# Altium PCB PCB_MonitorHolter.PcbDoc
Units mm, origin at the board's own origin, x right, y up, seen from the top; angles counter-clockwise.
Board outline 137.92 x 86.74 mm, 2 copper layers (Top Layer, Bottom Layer); 62 components, 106 nets, 248 pads, 91 vias.
Unrouted connection lines stored in the file: 198.
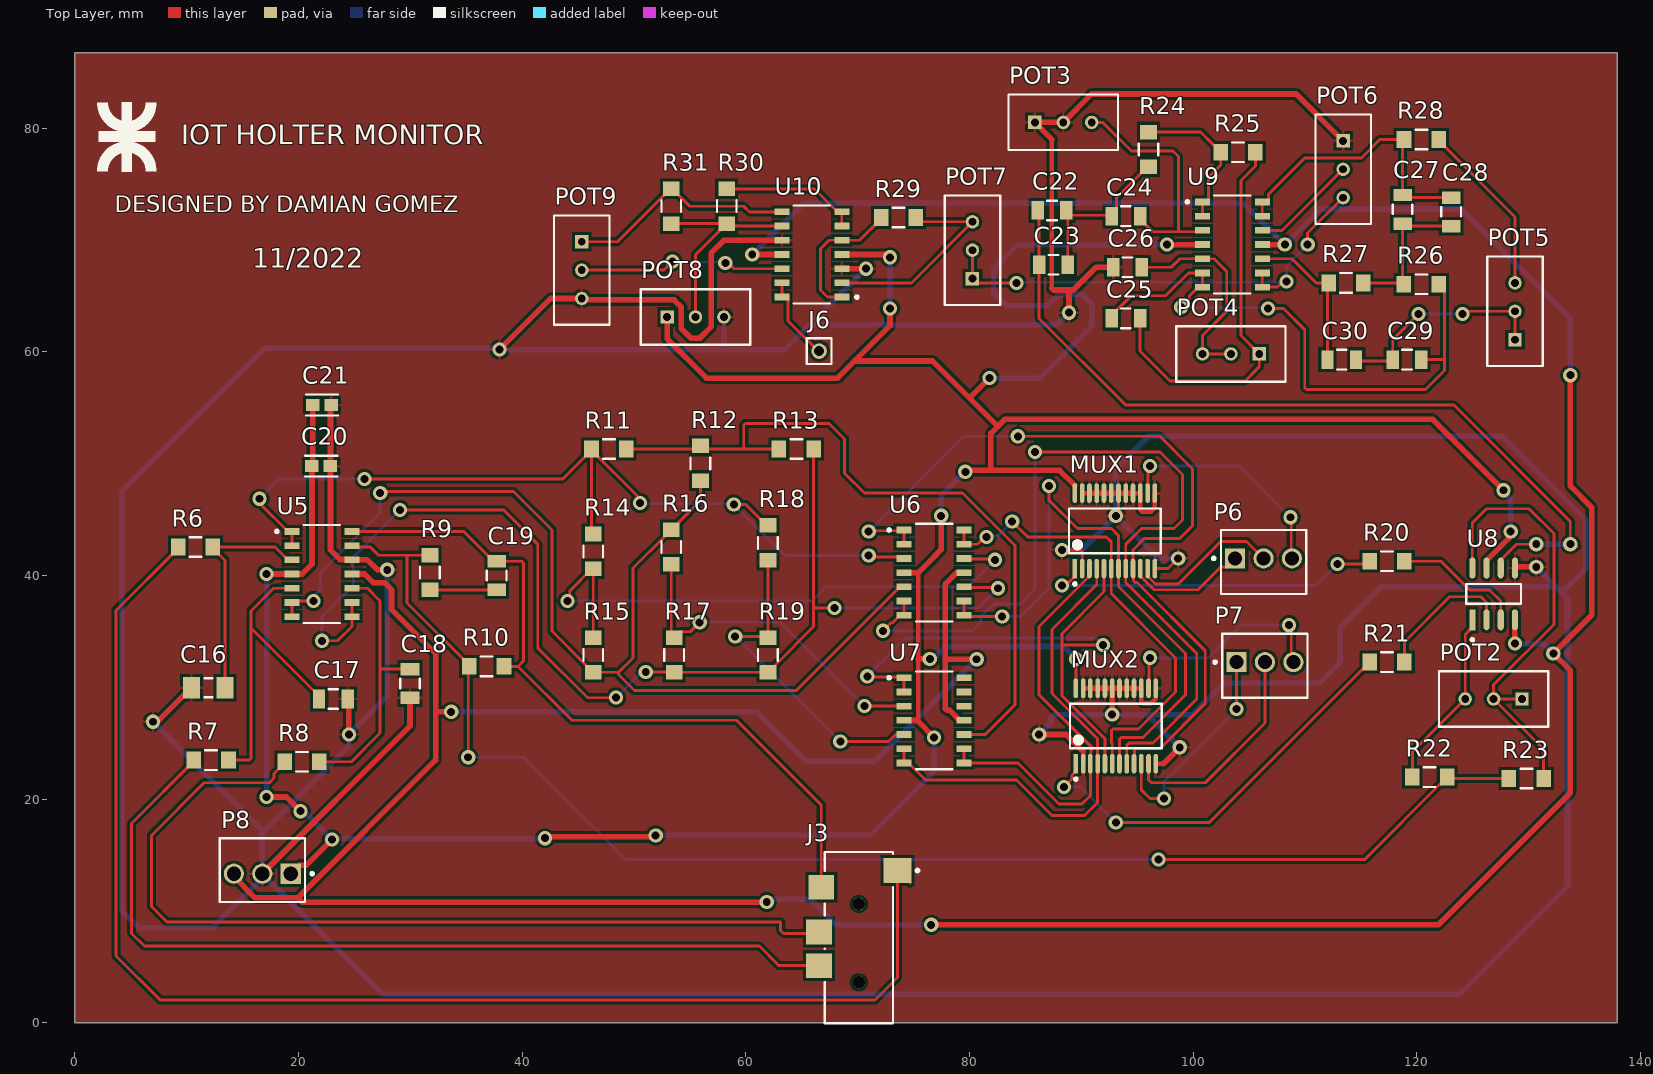
[diagram p0: Top Layer view]
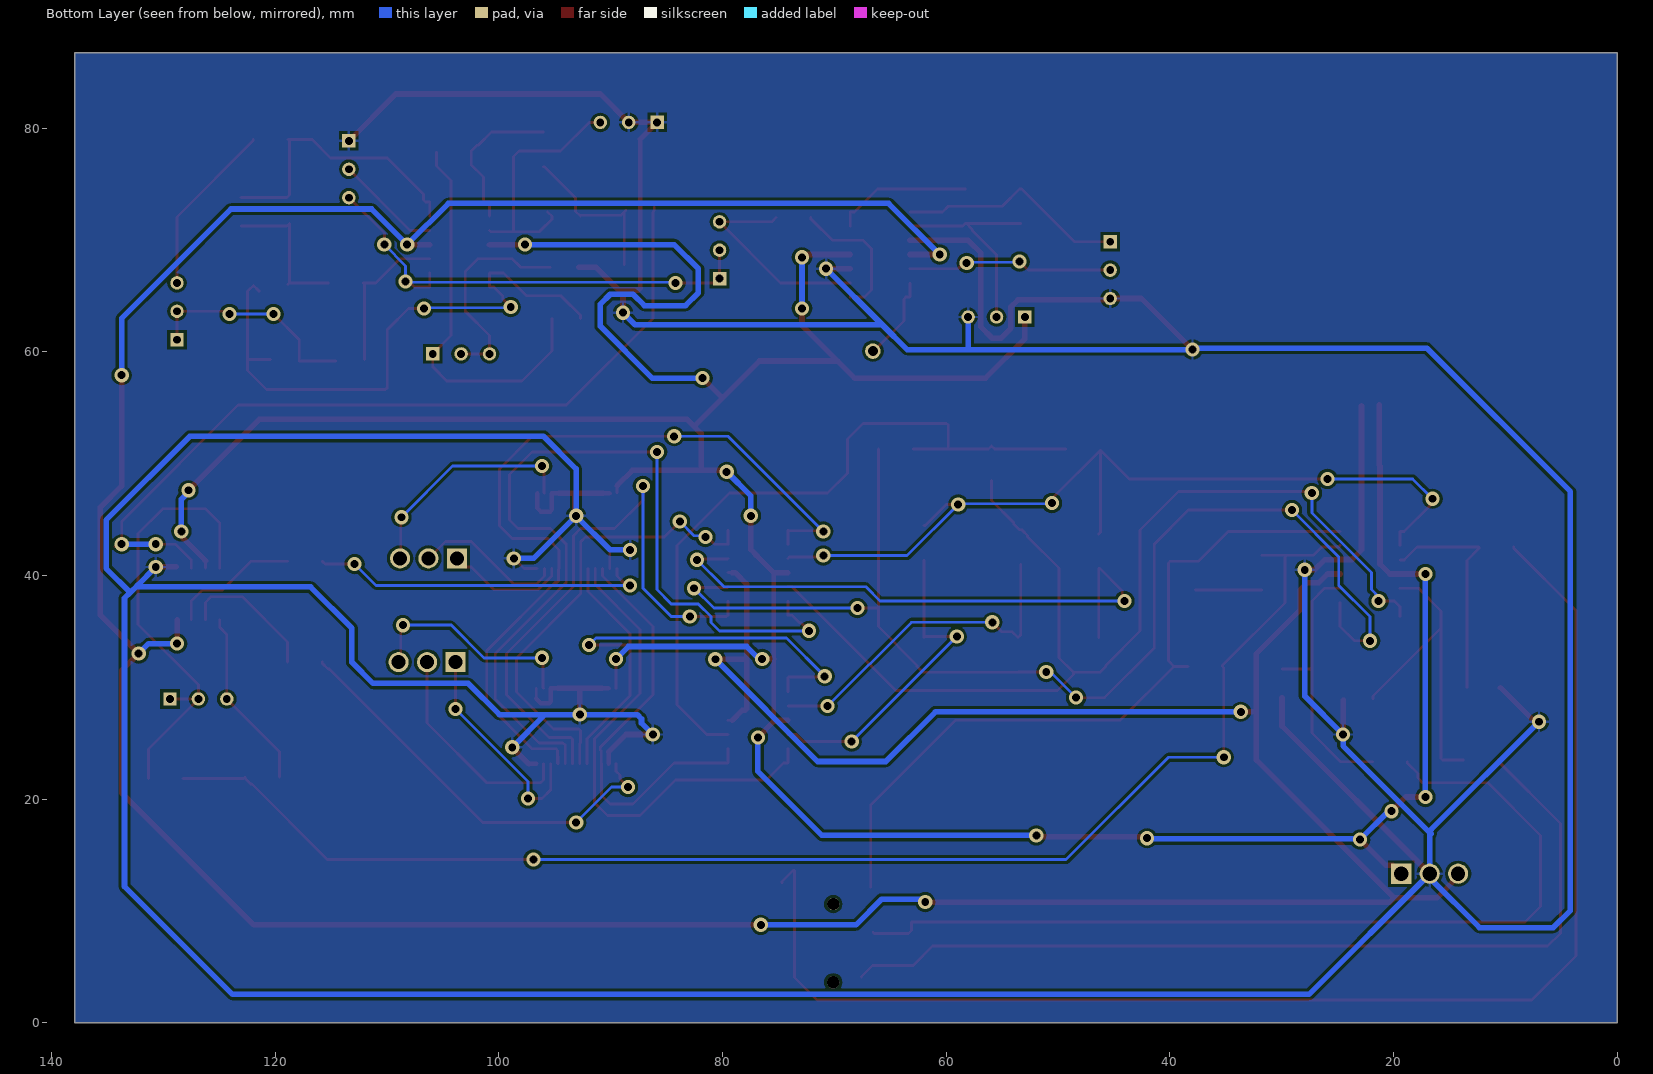
[diagram p1: Bottom Layer view, seen from below]
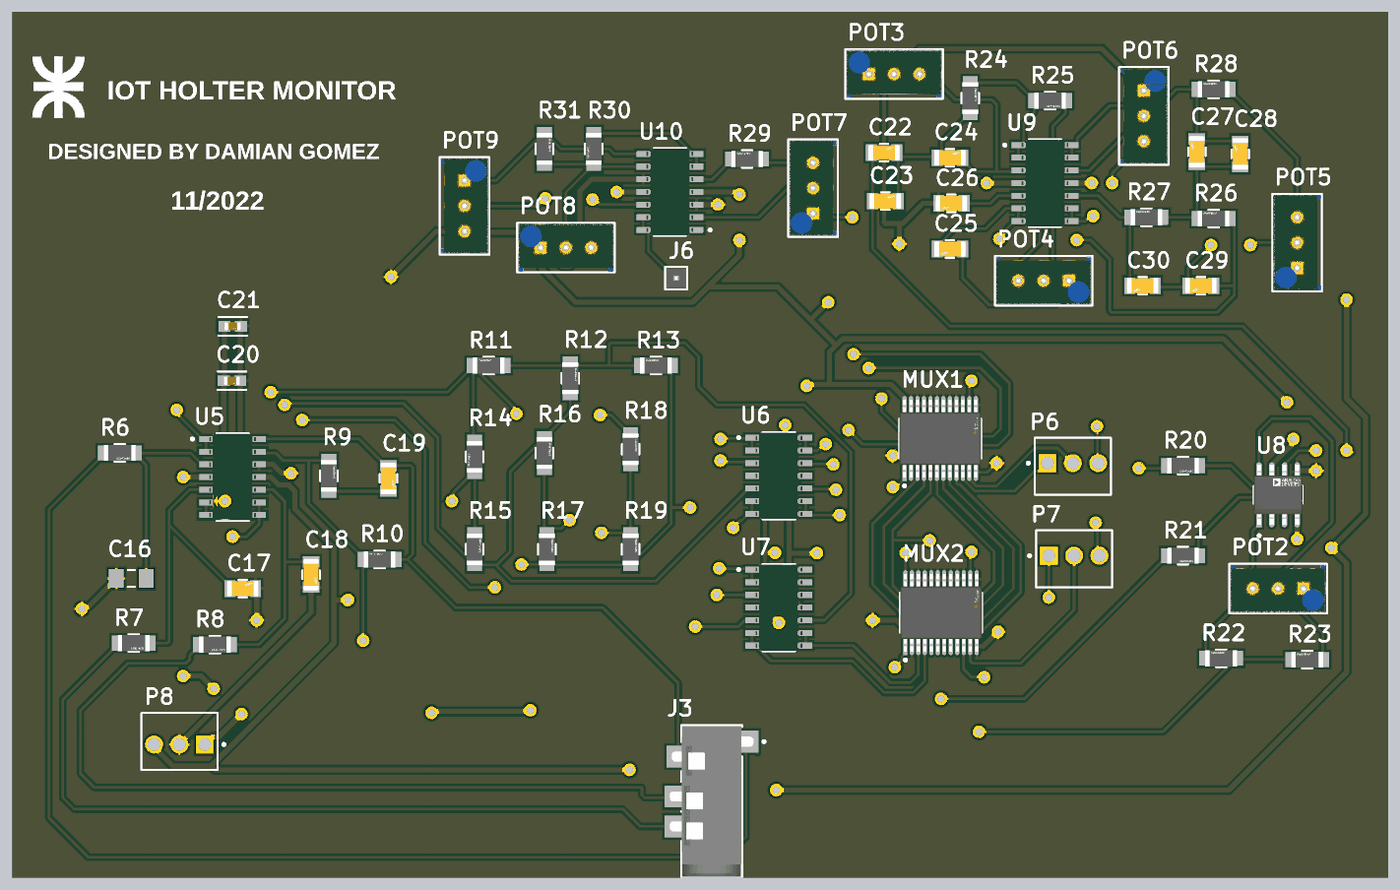
[diagram p2: 3D render of the assembled board from above, using the file's embedded part models]

## Layer stack, top to bottom
Top Solder: solder mask 0.0102, Solder Resist, Dk 3.5
Top Layer: signal copper 0.0356
Dielectric 1: dielectric 0.32, FR-4, Dk 4.8
Bottom Layer: signal copper 0.0356
Bottom Solder: solder mask 0.0102, Solder Resist, Dk 3.5

## Board outline
0,0 137.922,0 137.922,86.741 0,86.741

## Design rules (kind name [scope] priority, off if disabled: settings)
Clearance GND_Power [InNamedPolygon('POWER-GND')] p1: gap=0.254 ignorepadtopadclearanceinfootprint=FALSE
Clearance [All vs InNet('No Net')] p2: gap=0.254 ignorepadtopadclearanceinfootprint=FALSE
PolygonConnect [All] p1: connectstyle=Relief reliefconductorwidth=0.254 reliefentries=4 polygonreliefangle="90 Angle" airgapwidth=0.254
RoutingVias [All] p1: holewidth=0.711 width=1.27 viastyle="Through Hole" minholewidth=0.711 minwidth=1.27 maxholewidth=0.711 maxwidth=1.27
SolderMaskExpansion [All] p1: expansion=0.102
Width [All] p1: maxlimit=0.5 minlimit=0.254 preferedwidth=0.254 minimp=50.000000 maximp=50.000000 favimp=50.000000
30 further rules are at their usual default settings.

## Classes and differential pairs
component class "Filtrado y amplificación": C22 C23 C24 C25 C26 C27 C28 C29 C30 POT3 POT4 POT5 POT6 POT7 R24 R25 R26 R27 R28 R29 U9 U10
component class "Adquisición de señal y preamplificacion": C16 C17 C18 C19 C20 C21 J3 MUX1 MUX2 P6 P7 P8 POT2 R6 R7 R8 R9 R10 R11 R12 R13 R14 R15 R16 R17 R18 R19 R20 R21 R22 R23 U6 U7
component class "Acondicionamiento de la señal": POT8 POT9 R30 R31

## Components (designator, comment, footprint, x,y, rotation, side; value= is the part's Value field where it differs from the comment)
C16 "1.5n" KEMT-1206-2_M 11.938,29.972 r0 top
C17 "1.5nF" FP-CL31-IPC_C 23.114,28.956 r0 top
C18 "1.5nF" FP-CL31-IPC_C 29.972,30.353 r270 top
C19 "10nF" FP-CL31-IPC_C 37.719,40.005 r270 top
C20 "" FP-0603-L_1_6_0_15-W_0_81-IPC_A 22.034,49.784 r0 top
C21 "" FP-0603-L_1_6_0_15-W_0_81-IPC_A 22.098,55.245 r0 top
C22 "10uF" FP-CL31-IPC_C 87.384,72.644 r0 top
C23 "10uF" FP-CL31-IPC_C 87.511,67.788 r0 top
C24 "10uF" FP-CL31-IPC_C 93.988,72.136 r0 top
C25 "1u" FP-CL31-IPC_C 93.988,62.992 r180 top
C26 "1u" FP-CL31-IPC_C 94.128,67.564 r180 top
C27 "100n" FP-CL31-IPC_C 118.727,72.745 r90 top
C28 "100n" FP-CL31-IPC_C 123.071,72.517 r90 top
C29 "100n" FP-CL31-IPC_C 119.134,59.309 r180 top
C30 "100n" FP-CL31-IPC_C 113.292,59.309 r180 top
J3 "SJ2-3574A-SMT-TR" FP-SJ2-3574A-SMT-TR-MFG 70.104,7.62 r90 top
J6 "TMM-101-01-T-S" FP-TMM-101-01-T-S-MFG 66.554,60.071 r0 top
MUX1 "CD74HC4067SM96" FP-DB0024A-IPC_C 93.005,43.996 r90 top
MUX2 "CD74HC4067SM96" FP-DB0024A-IPC_C 93.091,26.543 r90 top
P6 "640456-3" TECO-640456-3 106.299,41.529 r180 top
P7 "640456-3" TECO-640456-3 106.426,32.258 r180 top
P8 "640456-3" TECO-640456-3 16.764,13.335 r0 top
POT2 "10k" FP-3296W-MFG 126.873,28.956 r90 top
POT3 "100k" FP-3296W-MFG 88.392,80.523 r270 top
POT4 "5k" FP-3296W-MFG 103.378,59.812 r90 top
POT5 "POT5" FP-3296W-MFG 128.781,63.627 r0 top
POT6 "50k" FP-3296W-MFG 113.419,76.327 r180 top
POT7 "10k" FP-3296W-MFG 80.264,69.088 r0 top
POT8 "10k" FP-3296W-MFG 55.499,63.124 r270 top
POT9 "10k" FP-3296W-MFG 45.339,67.31 r180 top
R6 "100k" FP-RC3216-MFG 10.795,42.545 r0 top
R7 "100k" FP-RC3216-MFG 12.192,23.495 r0 top
R8 "100k" FP-RC3216-MFG 20.32,23.342 r0 top
R9 "10k" FP-RC3216-MFG 31.75,40.259 r90 top
R10 "1M" FP-RC3216-MFG 36.83,31.877 r180 top
R11 "10k" FP-RC3216-MFG 47.752,51.308 r180 top
R12 "10k" FP-RC3216-MFG 55.942,50.038 r90 top
R13 "10k" FP-RC3216-MFG 64.516,51.308 r180 top
R14 "10k" FP-RC3216-MFG 46.355,42.164 r270 top
R15 "10k" FP-RC3216-MFG 46.355,32.893 r90 top
R16 "10k" FP-RC3216-MFG 53.34,42.545 r90 top
R17 "10k" FP-RC3216-MFG 53.594,32.893 r90 top
R18 "10k" FP-RC3216-MFG 61.976,42.926 r90 top
R19 "10k" FP-RC3216-MFG 61.976,32.893 r90 top
R20 "1k" FP-RC3216-MFG 117.348,41.275 r0 top
R21 "1k" FP-RC3216-MFG 117.348,32.258 r0 top
R22 "20k" FP-RC3216-MFG 121.158,21.971 r180 top
R23 "20k" FP-RC3216-MFG 129.794,21.844 r180 top
R24 "100k" FP-RC3216-MFG 96.016,78.105 r90 top
R25 "1k" FP-RC3216-MFG 104.021,77.851 r0 top
R26 "33k" FP-RC3216-MFG 120.404,66.04 r180 top
R27 "33k" FP-RC3216-MFG 113.673,66.167 r180 top
R28 "10k" FP-RC3216-MFG 120.41,78.994 r180 top
R29 "330k" FP-RC3216-MFG 73.66,72.009 r180 top
R30 "1k" FP-RC3216-MFG 58.293,73.025 r270 top
R31 "1k" FP-RC3216-MFG 53.34,73.025 r90 top
U5 "LM324DT" FP-SO-14-MFG 22.098,40.132 r0 top
U6 "LM324DT" FP-SO-14-MFG 76.835,40.259 r0 top
U7 "LM324DT" FP-SO-14-MFG 76.835,27.051 r0 top
U8 "AD620BRZ-R7" FP-R-8-IPC_C 126.873,38.354 r90 top
U9 "LM324DT" FP-SO-14-MFG 103.513,69.596 r0 top
U10 "LM324DT" FP-SO-14-MFG 65.913,68.707 r180 top

## Footprints (in the part's own frame and the unit in brackets; to place one, negate y for a bottom-side part, rotate by r counter-clockwise, add the part's x,y. Pads: shape width x height; smd on the part's side, far side on the other; paste and mask are expansions set on the pad)
FP-0603-L_1_6_0_15-W_0_81-IPC_A [mil]
  rect 47.5x42.06 smd paste+0 mask+0: 1(-32.51,0) 2(32.51,0)
  silkscreen extent -56,-37 56,37, body extent -76,-41 76,41, height 10
FP-3296W-MFG [mm]
  rect 1.2x1.2 hole 0.7 paste-1000 mask+0: 1(0.005,-2.54)
  round 1.2 hole 0.7 paste-1000 mask+0: 2(0.005,0) 3(0.005,2.54)
  silkscreen extent -2.48,-4.89 2.48,4.89, body extent -2.58,-4.99 2.58,4.99, height 0.25
FP-CL31-IPC_C [mm]
  rect 1.105x1.658 smd paste+0 mask+0: 1(-1.276,0) 2(1.276,0)
  silkscreen extent -0.42,-0.87 0.42,0.87, body extent -1.93,-0.97 1.93,0.97, height 0.25
FP-DB0024A-IPC_C [mm]
  rect 1.753x0.415 smd paste+0 mask+0: 1(-3.375,3.575)
  rrect100% 1.753x0.415 smd paste+0 mask+0: 2(-3.375,2.925) 3(-3.375,2.275) 4(-3.375,1.625) 5(-3.375,0.975) 6(-3.375,0.325) 7(-3.375,-0.325) 8(-3.375,-0.975) 9(-3.375,-1.625) 10(-3.375,-2.275) 11(-3.375,-2.925) 12(-3.375,-3.575) 13(3.375,-3.575) 14(3.375,-2.925) 15(3.375,-2.275) 16(3.375,-1.625) 17(3.375,-0.975) 18(3.375,-0.325) 19(3.375,0.325) 20(3.375,0.975) 21(3.375,1.625) 22(3.375,2.275) 23(3.375,2.925) 24(3.375,3.575)
  silkscreen extent -4.88,-4.1 2,4.1, body extent -4.35,-4.2 4.35,4.2, height 0.25
FP-R-8-IPC_C [mm]
  rect 1.874x0.542 smd paste+0 mask+0: 1(-2.316,1.905)
  rrect100% 1.874x0.542 smd paste+0 mask+0: 2(-2.316,0.635) 3(-2.316,-0.635) 4(-2.316,-1.905) 5(2.316,-1.905) 6(2.316,-0.635) 7(2.316,0.635) 8(2.316,1.905)
  silkscreen extent -4.23,-2.45 0.88,2.45, body extent -3.35,-2.55 3.35,2.55, height 0.25
FP-RC3216-MFG [mm]
  rect 1.3x1.5 smd paste+0 mask+0: 1(-1.55,0) 2(1.55,0)
  silkscreen extent -0.53,-0.87 0.53,0.87, body extent -2.3,-0.97 2.3,0.97, height 0.25
FP-SJ2-3574A-SMT-TR-MFG [mm]
  rect 2.2x2.5 smd paste+0 mask+0: 1(6,-3.45)
  rect 2.2x2.3 smd paste+0 mask+0: 2(4.5,3.35) 3(0.5,3.55) 4(-2.5,3.55)
  round 1.1 hole 1.1 unplated paste-1000 mask+0: ""(-4,0) ""(3,0)
  silkscreen extent -7.65,-5.38 7.65,3.05, body extent -7.75,-4.8 7.75,4.8, height 0.25
FP-SO-14-MFG [mm]
  rect 1.35x0.6 smd paste+0 mask+0: 1(-2.675,3.81) 2(-2.675,2.54) 3(-2.675,1.27) 4(-2.675,0) 5(-2.675,-1.27) 6(-2.675,-2.54) 7(-2.675,-3.81) 8(2.675,-3.81) 9(2.675,-2.54) 10(2.675,-1.27) 11(2.675,0) 12(2.675,1.27) 13(2.675,2.54) 14(2.675,3.81)
  silkscreen extent -4.15,-4.37 1.62,4.37, body extent -3.45,-4.47 3.45,4.47, height 0.25
FP-TMM-101-01-T-S-MFG [mm]
  round 1.39 hole 0.89 paste-1000 mask+0: 1(0,0)
  silkscreen extent -1.1,-1.15 1.1,1.15, body extent -1.1,-1.15 1.1,1.15, height 0.25
KEMT-1206-2_M [mm] "SMD, 2-Leads, Body 3.4x1.8mm, IPC Low Density"
  rect 1.5x1.9 smd: 1(-1.5,0) 2(1.5,0)
  silkscreen extent -0.35,-0.85 0.35,0.85, body extent -1.7,-0.9 1.7,0.9, height 0.88
TECO-640456-3 [mm] "Through Hole, 3-Leads, Body 7.62x5.72mm, Pitch 2.54mm"
  rect 1.8x1.8 hole 1.27 paste+0: 1(2.54,0)
  round 1.8 hole 1.27 paste+0: 2(0,0) 3(-2.54,0)
  silkscreen extent -3.81,-2.54 4.59,3.18, body extent -3.81,-2.54 3.81,3.18, height 10.03

## Part data
C16: library part CMP-1037-04202-2, "CAP, Ceramic, 0.1 uF, +/- 10%, 50 V, -55 to 125 degC, 1206 (3216 Metric), RoHS, Tape and Reel", Capacitance=0.1µF, Capacitance Tolerance=±10%, Capacitor Case Style=1206[3216Metric], Dielectric Characteristic=X7R, Manufacturer=Kemet, Operating Temperature Max=125degC, Operating Temperature Min=-55degC, Package Description="2-Leads SMD, Body 3.2 x 1.6 mm", Package Reference=1206-2, Voltage Rating=50V, Datasheet URL=https://datasheet.ciiva.com/6125/1725438-6125494.pdf, Datasheet Version=Jul-13, Manufacturer URL=http://www.kemet.com/, Packaging=Tape&Reel, Product Range=KEMET-CSeries, SVHC=ToBeAdvised
C17 C18: library part CMP-13271-001211-1, "Cap Ceramic 1.5nF 500V C0G ±5% SMD 1206 +125°C Embossed T/R", Capacitance=220pF, Case/Package=1206, Dielectric=C0G, Max Operating Temperature=125°C, Min Operating Temperature=-55°C, Package Quantity=10000, Tolerance=5%, Voltage Rating=500V, Depth=1.6mm, Height=1.25mm, Length=3.2mm, Mount="Surface Mount", Packaging="Tape and Reel", Radiation Hardening=No, Thickness=0.055inch, Voltage Rating (DC)=500V, Width=0.063inch
C19: library part CMP-13271-001211-1, "Cap Ceramic 10nF 500V C0G ±5% SMD 1206 +125°C Embossed T/R", Capacitance=220pF, Case/Package=1206, Dielectric=C0G, Max Operating Temperature=125°C, Min Operating Temperature=-55°C, Package Quantity=10000, Tolerance=5%, Voltage Rating=500V, Depth=1.6mm, Height=1.25mm, Length=3.2mm, Mount="Surface Mount", Packaging="Tape and Reel", Radiation Hardening=No, Thickness=0.055inch, Voltage Rating (DC)=500V, Width=0.063inch
C20 C21: library part CMP-2006-04378-2, "General Purpose Ceramic Capacitor, 0603, 1nF, 10%, X7R, 15%, 50V", Capacitance=1nF, Case/Package=0603, Case Code (Metric)=1608, Dielectric=X7R, Dielectric Material=Ceramic, Max Operating Temperature=125°C, Min Operating Temperature=-55°C, Package Quantity=4000, Tolerance=10%, Voltage=50V, Case Code (Imperial)=0603, Construction=Flat, Contact Plating=Tin, Depth=0.81mm, Height=0.9mm, Lead Free="Lead Free", Length=1.6mm, Mount="Surface Mount", Number of Pins=2, Packaging="Tape and Reel", Radiation Hardening=No, REACH SVHC="No SVHC", RoHS Compliant=Yes, Series=-, Termination=SMD/SMT, Thickness=0.035inch, Voltage Rating=50V, Voltage Rating (DC)=50V, Weight=7.1E-05oz, Width=0.032inch
C22 C23 C24: library part CMP-13271-001211-1, "Cap Ceramic 10uF 500V C0G ±5% SMD 1206 +125°C Embossed T/R", Capacitance=220pF, Case/Package=1206, Dielectric=C0G, Max Operating Temperature=125°C, Min Operating Temperature=-55°C, Package Quantity=10000, Tolerance=5%, Voltage Rating=500V, Depth=1.6mm, Height=1.25mm, Length=3.2mm, Mount="Surface Mount", Packaging="Tape and Reel", Radiation Hardening=No, Thickness=0.055inch, Voltage Rating (DC)=500V, Width=0.063inch
C25 C26: library part CMP-13271-001211-1, "Cap Ceramic 1uF 500V C0G ±5% SMD 1206 +125°C Embossed T/R", Capacitance=220pF, Case/Package=1206, Dielectric=C0G, Max Operating Temperature=125°C, Min Operating Temperature=-55°C, Package Quantity=10000, Tolerance=5%, Voltage Rating=500V, Depth=1.6mm, Height=1.25mm, Length=3.2mm, Mount="Surface Mount", Packaging="Tape and Reel", Radiation Hardening=No, Thickness=0.055inch, Voltage Rating (DC)=500V, Width=0.063inch
C27 C28 C29 C30: library part CMP-13271-001211-1, "Cap Ceramic 100nF 500V C0G ±5% SMD 1206 +125°C Embossed T/R", Capacitance=220pF, Case/Package=1206, Dielectric=C0G, Max Operating Temperature=125°C, Min Operating Temperature=-55°C, Package Quantity=10000, Tolerance=5%, Voltage Rating=500V, Depth=1.6mm, Height=1.25mm, Length=3.2mm, Mount="Surface Mount", Packaging="Tape and Reel", Radiation Hardening=No, Thickness=0.055inch, Voltage Rating (DC)=500V, Width=0.063inch
J3: library part CMP-14818-000001-1, "AUDIO JACK, 3.5 MM, RT, 4 CONDUC", Current Rating=1A, Manufacturer=CUI, Temperature="-25°C to +85°C", Temperature Range High=+85°C, Temperature Range Low=-25°C, Voltage Rating=12V, Automotive=No, Category=Conn, ComponentLink2Description=Datasheet, ComponentLink2URL=https://www.cui.com/product/resource/sj2-357x-smt.pdf, Conn Orientation=Horizontal, Contact Material=Silver, Device Class L1=Connectors, Device Class L2="Audio / Video Connectors", Device Class L3=unset, Digikey Description="AUDIO JACK, 3.5 MM, RT, 4 CONDUC", Height=5.3mm, Lead Free=Yes, Manufacturer Part Number=SJ2-3574A-SMT-TR, Number of Contacts=4, Octopart=https://octopart.com/sj2-3574a-smt-tr-cui-77838840, Package=SJ2-3574A-SMT-TR, RoHS=TRUE
J6: library part CMP-02766-001504-1, "CONN HEADER VERT 1POS", Insulation Color=Black, Max Operating Temperature=105°C, Min Operating Temperature=-55°C, Connector Type=Header, Contact Finish - Mating=TIN, Contact Material=Bronze, Contact Plating=Tin, Contact Shape=Square, Contact Type="Male Pin", Fastening Type=Pull, Gender=Male, Insulation Material=Polymer, Lead Free="Lead Free", Mount="Through Hole", Number of Contacts=1, Number of Positions=1, Number of Rows=1, Packaging=Bulk, Radiation Hardening=No, REACH SVHC="No SVHC", Series=TMM, Termination=Solder
MUX1 MUX2: library part CMP-04892-000038-1, "IC MUX/DEMUX 1X16 24SSOP", Case/Package=SSOP, High Level Output Current=25mA, Max Operating Temperature=125°C, Max Supply Current=8uA, Max Supply Voltage=6V, Min Operating Temperature=-55°C, Min Supply Voltage=2V, On-State Resistance=160R, Package Quantity=2000, Bandwidth=89MHz, Contact Plating=Gold, Height=1.95mm, Lead Free="Lead Free", Length=8.2mm, Logic Function=Multiplexer, Low Level Output Current=25mA, Max Output Current=25mA, Mount="Surface Mount", Number of Bits=16, Number Of Channels=1, Number of Circuits=16, Number of Inputs=16, Number of Outputs=1, Number of Pins=24, Operating Supply Current=8uA, Packaging="Tape and Reel", Polarity=Non-Inverting, Propagation Delay=75ns, Radiation Hardening=No, REACH SVHC="No SVHC", Series=74HC, Supply Type=Single, Termination=SMD/SMT, Turn-Off Delay Time=290ns, Turn-On Delay Time=300ns, Weight=0.006081oz, Width=5.3mm
P6 P7 P8: library part CMP-2000-05418-1, "Male Header, Pitch 2.54 mm, 1 x 3 Position, Height 10.03 mm, Tail Length 3.56 mm, -55 to 105 degC", Color=White, Current, Rating="5 /  / A", Flammability Rating=UL94V-0, Manufacturer="TE Connectivity", Temperature, Operating="-55to+105 /  / degC", Voltage, Rating="250 /  / V", Agency Approvals=CSA,UL, Angle=Straight, Brand/Series=MTA-100Series, Color, Housing=White, Connector Type=MTA-100, Contact Centerline Spacing="0.100 /  / in.", Contact Mating Area Plating=Tin, Contact Plating=Tin, Contact Shape=Square, Contact Termination Area Plating=Tin, Datasheet URL=https://datasheet.ciiva.com/16456/eng-ds-82056-mta-0608-16456886.pdf, Datasheet Version=Jun-08, Length, Overall="0.3 /  / \"", Length, Pin="0.14 /  / \"", Length, Terminal Post="0.14 /  / in.", Manufacturer URL=http://www.te.com/, Material, Contact=CopperAlloy, Material, Housing=Polyester, Mount Angle=Vertical, Mounting Hole Size="0.04 /  / \"", Mounting Type=PCMount, Number of Contacts=3, Number of Positions=3, Number of Rows=1, Pin Spacing="0.1 /  / \"", Primary Type=InterconnectSystem, Size, Post="0.025 /  / in.", Special Features=Pinstrip, Standards=RoHSCompliant,ELVCompliant,UL94V-0, Termination=Solder, Type=PCBPlug
POT2 POT5 POT7 POT8 POT9: library part CMP-07234-000024-1, "TRIMMER 10K OHM 0.5W PC PIN TOP", Max Operating Temperature=125°C, Max Power Dissipation=500mW, Min Operating Temperature=-55°C, Package Quantity=1, Resistance=10kR, Temperature Coefficient=100ppm/°C, Tolerance=10%, Composition=Cermet, Contact Plating=Tin, Depth=4.83mm, Height=0.395inch, Length=9.53mm, Military Standard=Not, Mount="Through Hole", Number of Turns=25, Packaging="Tape and Reel", Power Rating=500mW, Radiation Hardening=No, REACH SVHC="No SVHC", Taper=Linear, Termination=Pin, Weight=0.03oz, Width=0.19inch
POT3: library part CMP-07234-000024-1, "TRIMMER 100K OHM 0.5W PC PIN TOP", Max Operating Temperature=125°C, Max Power Dissipation=500mW, Min Operating Temperature=-55°C, Package Quantity=1, Resistance=10kR, Temperature Coefficient=100ppm/°C, Tolerance=10%, Composition=Cermet, Contact Plating=Tin, Depth=4.83mm, Height=0.395inch, Length=9.53mm, Military Standard=Not, Mount="Through Hole", Number of Turns=25, Packaging="Tape and Reel", Power Rating=500mW, Radiation Hardening=No, REACH SVHC="No SVHC", Taper=Linear, Termination=Pin, Weight=0.03oz, Width=0.19inch
POT4: library part CMP-07234-000024-1, "TRIMMER 5K OHM 0.5W PC PIN TOP", Max Operating Temperature=125°C, Max Power Dissipation=500mW, Min Operating Temperature=-55°C, Package Quantity=1, Resistance=10kR, Temperature Coefficient=100ppm/°C, Tolerance=10%, Composition=Cermet, Contact Plating=Tin, Depth=4.83mm, Height=0.395inch, Length=9.53mm, Military Standard=Not, Mount="Through Hole", Number of Turns=25, Packaging="Tape and Reel", Power Rating=500mW, Radiation Hardening=No, REACH SVHC="No SVHC", Taper=Linear, Termination=Pin, Weight=0.03oz, Width=0.19inch
POT6: library part CMP-07234-000024-1, "TRIMMER 50K OHM 0.5W PC PIN TOP", Max Operating Temperature=125°C, Max Power Dissipation=500mW, Min Operating Temperature=-55°C, Package Quantity=1, Resistance=10kR, Temperature Coefficient=100ppm/°C, Tolerance=10%, Composition=Cermet, Contact Plating=Tin, Depth=4.83mm, Height=0.395inch, Length=9.53mm, Military Standard=Not, Mount="Through Hole", Number of Turns=25, Packaging="Tape and Reel", Power Rating=500mW, Radiation Hardening=No, REACH SVHC="No SVHC", Taper=Linear, Termination=Pin, Weight=0.03oz, Width=0.19inch
R6 R7 R8 R20 R21 R24 R25 R30 R31: library part CMP-13261-001932-1, "Res Thick Film 1206 1kO 5% 0.25W ±100ppm/°C Molded SMD T/R", Case/Package=1206, Case Code (Metric)=3216, Max Operating Temperature=155°C, Max Power Dissipation=250mW, Min Operating Temperature=-55°C, Resistance=1kR, Temperature Coefficient=100ppm/°C, Tolerance=5%, Voltage Rating (DC)=200V, Case Code (Imperial)=1206, Composition="Thick Film", Contact Plating=Tin, Depth=1.6mm, Features="Moisture Resistant", Height=0.026inch, Lead Free="Lead Free", Length=0.126inch, Military Standard=Not, Number of Terminations=2, Packaging="Tape and Reel", Power Rating=250mW, Radiation Hardening=No, Width=0.063inch
R9 R11 R12 R13 R14 R15 R16 R17 R18 R19 R28: library part CMP-13261-001932-1, "Res Thick Film 1206 10kO 5% 0.25W ±100ppm/°C Molded SMD T/R", Case/Package=1206, Case Code (Metric)=3216, Max Operating Temperature=155°C, Max Power Dissipation=250mW, Min Operating Temperature=-55°C, Resistance=1kR, Temperature Coefficient=100ppm/°C, Tolerance=5%, Voltage Rating (DC)=200V, Case Code (Imperial)=1206, Composition="Thick Film", Contact Plating=Tin, Depth=1.6mm, Features="Moisture Resistant", Height=0.026inch, Lead Free="Lead Free", Length=0.126inch, Military Standard=Not, Number of Terminations=2, Packaging="Tape and Reel", Power Rating=250mW, Radiation Hardening=No, Width=0.063inch
R10: library part CMP-13261-001932-1, "Res Thick Film 1206 1MO 5% 0.25W ±100ppm/°C Molded SMD T/R", Case/Package=1206, Case Code (Metric)=3216, Max Operating Temperature=155°C, Max Power Dissipation=250mW, Min Operating Temperature=-55°C, Resistance=1kR, Temperature Coefficient=100ppm/°C, Tolerance=5%, Voltage Rating (DC)=200V, Case Code (Imperial)=1206, Composition="Thick Film", Contact Plating=Tin, Depth=1.6mm, Features="Moisture Resistant", Height=0.026inch, Lead Free="Lead Free", Length=0.126inch, Military Standard=Not, Number of Terminations=2, Packaging="Tape and Reel", Power Rating=250mW, Radiation Hardening=No, Width=0.063inch
R22 R23: library part CMP-13261-001932-1, "Res Thick Film 1206 20kO 5% 0.25W ±100ppm/°C Molded SMD T/R", Case/Package=1206, Case Code (Metric)=3216, Max Operating Temperature=155°C, Max Power Dissipation=250mW, Min Operating Temperature=-55°C, Resistance=1kR, Temperature Coefficient=100ppm/°C, Tolerance=5%, Voltage Rating (DC)=200V, Case Code (Imperial)=1206, Composition="Thick Film", Contact Plating=Tin, Depth=1.6mm, Features="Moisture Resistant", Height=0.026inch, Lead Free="Lead Free", Length=0.126inch, Military Standard=Not, Number of Terminations=2, Packaging="Tape and Reel", Power Rating=250mW, Radiation Hardening=No, Width=0.063inch
R26 R27: library part CMP-13261-001932-1, "Res Thick Film 1206 33kO 5% 0.25W ±100ppm/°C Molded SMD T/R", Case/Package=1206, Case Code (Metric)=3216, Max Operating Temperature=155°C, Max Power Dissipation=250mW, Min Operating Temperature=-55°C, Resistance=1kR, Temperature Coefficient=100ppm/°C, Tolerance=5%, Voltage Rating (DC)=200V, Case Code (Imperial)=1206, Composition="Thick Film", Contact Plating=Tin, Depth=1.6mm, Features="Moisture Resistant", Height=0.026inch, Lead Free="Lead Free", Length=0.126inch, Military Standard=Not, Number of Terminations=2, Packaging="Tape and Reel", Power Rating=250mW, Radiation Hardening=No, Width=0.063inch
R29: library part CMP-13261-001932-1, "Res Thick Film 1206 330kO 5% 0.25W ±100ppm/°C Molded SMD T/R", Case/Package=1206, Case Code (Metric)=3216, Max Operating Temperature=155°C, Max Power Dissipation=250mW, Min Operating Temperature=-55°C, Resistance=1kR, Temperature Coefficient=100ppm/°C, Tolerance=5%, Voltage Rating (DC)=200V, Case Code (Imperial)=1206, Composition="Thick Film", Contact Plating=Tin, Depth=1.6mm, Features="Moisture Resistant", Height=0.026inch, Lead Free="Lead Free", Length=0.126inch, Military Standard=Not, Number of Terminations=2, Packaging="Tape and Reel", Power Rating=250mW, Radiation Hardening=No, Width=0.063inch
U5 U6 U7 U9 U10: library part CMP-12131-000005-1, "IC OPAMP GP 4 CIRCUIT 14SO", Input Bias Current=0.02uA, Input Offset Voltage=2mV, Manufacturer=STMicroelectronics, Max Dual Supply Voltage=15V, Max Junction Temp=+150°C, Max Supply Voltage=30V, Min Dual Supply Voltage=1.5V, Min Supply Voltage=3V, Nominal Supply Current=0.7-1.5mA, Output Current Per Channel=20-50mA, Package=SO-14, Temperature="0°C to +70°C", Temperature Range High=+70°C, Temperature Range Low=0°C, Voltage Gain=100dB, Automotive=No, Bandwidth=1.3MHz, Category=IC, ComponentLink2Description=Datasheet, ComponentLink2URL=https://www.st.com/content/ccc/resource/technical/document/datasheet/bd/fc/46/43/26/8f/40/7f/CD00001046.pdf/files/CD00001046.pdf/jcr:content/translations/en.CD00001046.pdf, Device Class L1="Integrated Circuits (ICs)", Device Class L2="Linear ICs", Device Class L3="Amplifiers - Op Amps", Digikey Description="IC OPAMP GP 4 CIRCUIT 14SO", Footprint Url=https://www.st.com/content/ccc/resource/technical/document/datasheet/group3/10/8a/e6/12/f8/e8/49/ce/DM00366438/files/DM00366438.pdf/jcr:content/translations/en.DM00366438.pdf, Gain Bandwidth=1.3MHz, Height=1.75mm, Lead Free=Yes, Manufacturer Part Number=LM324DT, Mouser Description="LM324 Series 32 V 1.3 MHz Low Power Quad Operational Amplifier - SOIC-14", Number Of Channels=4, Octopart=https://octopart.com/lm324dt-stmicroelectronics-39579146, RoHS=TRUE, Standoff Height=0.1mm
U8: library part CMP-09116-000394-1, "IC INST AMP 1 CIRCUIT 8SOIC", Case/Package=SOIC, Input Bias Current=1nA, Input Offset Voltage (Vos)=30mV, Input Resistance=10GR, Max Dual Supply Voltage=18V, Max Operating Temperature=125°C, Max Power Dissipation=650mW, Min Dual Supply Voltage=2.3V, Min Operating Temperature=-55°C, Min Supply Voltage=4.6V, Nominal Supply Current=1.3mA, Output Current Per Channel=18mA, Package Quantity=1, -3db Bandwidth=1MHz, Amplifier Type="INSTRUMENTATION AMPLIFIER", Common Mode Rejection Ratio=93dB, Contact Plating=Tin, Lead Free="Contains Lead", Mount="Surface Mount", Number Of Channels=1, Number of Circuits=1, Number of Elements=1, Number of Pins=8, Operating Supply Current=1.3mA, Operating Supply Voltage=18V, Packaging="Tape and Reel", Power Dissipation=650mW, Radiation Hardening=No, RoHS Compliant=Yes, Series=-, Slew Rate=1.2V/µs

## Via types
v1: diameter 1.27, hole 0.711, Top Layer to Bottom Layer, 91 vias

## Nets (pads, with @x,y where several pads share a name; then routed paths per layer and width w, separated by ;. In a path a pad name is that pad's centre, name@x,y a point inside that pad or via, vN(x,y) a via of type N, cw(c..) or ccw(c..) an arc to the next point about the centre after c; other vN are vias at no path point)
3.3V: 
5V: C20.1 C21.1 MUX1.24 MUX2.24 P8.1 POT8.1 U5.4 U6.4 U7.4 U8.7 U9.4 U10.4 | length 326.6
  Top Layer w0.254: P8.1 P8.1@20.077,14.108 ; C20.1 C20.1@21.272,49.848 ; v1(42.037,16.51) v1@42.164,16.637 ; v1@51.816,16.637 v1(51.943,16.764) ; v1@72.39,68.707 72.644,68.453 v1(72.898,68.453) ; 75.384,26.978 75.384,27.051 75.438,27.105 ; 76.962,41.783 76.962,41.809 ; v1(79.629,49.276) v1@79.756,49.403 ; MUX1.24 MUX1.24@89.43,48.04 ; MUX2.24 89.526,29.928 89.526,32.537 v1(89.535,32.547) ; v1(97.663,69.596) v1@97.79,69.469 ; U8.7 U8.7@126.238,41.336 ; 128.203,43.301 128.203,43.748 v1(128.397,43.942)
  Top Layer w0.4: 75.438,27.105 75.438,32.512 75.438,40.259
  Top Layer w0.5: v1(17.145,20.193) 18.923,20.193 v1(20.193,18.923) ; v1(17.145,40.132) U5.4 20.32,40.132 21.208,41.02 C20.1 ; P8.1@20.077,14.108 20.712,14.108 v1(22.987,16.383) ; C20.1@21.272,49.848 C21.1 ; v1@42.164,16.637 v1@51.816,16.637 ; POT8.1 52.959,61.175 56.476,57.658 68.199,57.658 69.723,59.182 ; U10.4 v1@72.39,68.707 ; v1(72.898,63.881) 72.898,62.357 69.723,59.182 ; U7.4 75.384,27.051 ; U6.4 75.438,40.259 76.962,41.783 ; 75.384,26.978 v1(76.835,25.527) ; 75.438,32.512 75.473,32.547 v1(76.454,32.547) ; 76.962,41.809 77.47,42.317 v1(77.47,45.339) ; v1@79.756,49.403 81.915,49.403 ; v1(81.788,57.658) 80.01,55.88 ; 82.55,53.34 80.01,55.88 ; MUX1.24@89.43,48.04 88.067,49.403 81.915,49.403 ; v1@97.79,69.469 98.52,69.596 U9.4 ; U8.7@126.238,41.336 128.203,43.301 ; v1(127.762,47.625) 121.412,53.975 83.185,53.975 81.915,52.705 81.915,49.403 ; 69.723,59.182 76.708,59.182 80.01,55.88
  Bottom Layer w0.254: v1(20.193,18.923) v1@20.447,18.923 ; v1(22.987,16.383) v1@23.05,16.447 ; v1@41.974,16.447 v1(42.037,16.51) ; v1@127.762,47.458 v1(127.762,47.625)
  Bottom Layer w0.5: v1(17.145,20.193) v1(17.145,40.132) ; v1@20.447,18.923 v1(22.987,16.383) ; v1@23.05,16.447 v1@41.974,16.447 ; v1(51.943,16.764) 71.12,16.764 76.835,22.479 v1(76.835,25.527) ; v1(72.898,63.881) v1(72.898,68.453) ; v1(76.454,32.547) 76.743,32.547 77.851,33.655 88.427,33.655 v1(89.535,32.547) ; v1(77.47,45.339) 77.47,47.117 v1(79.629,49.276) ; v1(81.788,57.658) 86.296,57.658 90.932,62.293 90.932,64.262 90.043,65.151 88.011,65.151 86.995,64.135 83.312,64.135 82.169,65.278 82.169,67.437 84.328,69.596 v1(97.663,69.596) ; v1@127.762,47.458 128.397,46.823 v1(128.397,43.942)
"(LA\"+LL\")/2": MUX1.5 MUX2.5 U7.1 U7.2 | length 51.7
  Top Layer w0.254: v1(70.866,30.988) 70.929,30.924 74.097,30.924 U7.1 U7.2 ; v1(91.948,33.782) 88.265,33.782 ; MUX1.5 92.03,38.563 88.265,34.798 88.265,33.782 ; MUX2.5 92.116,25.4 88.265,29.251 88.265,33.782
  Bottom Layer w0.254: v1(70.866,30.988) 74.295,34.417 91.313,34.417 v1(91.948,33.782)
(LA'+LL')/2: R16.1 R17.2 U7.3 | length 30.9
  Top Layer w0.254: R16.1 53.34,34.697 R17.2 54.117,34.966 55.032,34.966 v1(55.88,35.814) ; v1(70.612,28.321) U7.3
  Bottom Layer w0.254: v1(55.88,35.814) 63.119,35.814 v1(70.612,28.321)
"(RA\"+LA\")/2": MUX1.6 MUX2.6 U6.13 U6.14 | length 42
  Top Layer w0.254: U6.14 U6.13 80.732,42.799 81.367,43.434 v1(81.534,43.434) ; v1(83.82,44.831) 85.217,43.434 92.269,43.434 92.68,43.023 MUX1.6 92.68,38.384 98.425,32.639 98.425,29.591 95.123,26.289 92.859,26.289 92.71,26.14 92.71,25.038 92.766,24.982 MUX2.6
  Bottom Layer w0.254: v1(81.534,43.434) 81.661,43.561 82.55,43.561 v1(83.82,44.831)
"(RA\"+LL\")/2": MUX1.4 MUX2.4 U7.6 U7.7 | length 45.3
  Top Layer w0.254: U7.6 U7.7 74.535,23.241 76.059,21.717 84.201,21.717 87.376,18.542 90.297,18.542 91.44,19.685 91.44,23.142 MUX2.4 91.44,23.194 91.44,25.4 87.376,29.464 87.376,35.179 91.38,39.183 MUX1.4
(RA'+LA')/2: R14.2 R15.2 U6.12 | length 52.7
  Top Layer w0.254: v1(44.069,37.719) 44.263,37.913 44.263,38.622 46.255,40.614 R14.2 R15.2 ; U6.12 79.574,41.465 82.233,41.465 v1(82.296,41.402)
  Bottom Layer w0.254: v1(44.069,37.719) 65.913,37.719 67.183,38.989 79.883,38.989 v1(82.296,41.402)
(RA'+LL')/2: R18.1 R19.2 U7.5 | length 29.2
  Top Layer w0.254: v1(59.055,34.544) 61.875,34.544 R19.2 R18.1 ; v1(68.453,25.146) 72.771,25.146 73.406,25.781 U7.5
  Bottom Layer w0.254: v1(59.055,34.544) v1(68.453,25.146)
-5V: P8.3 U5.11 U6.11 U7.11 U8.4 U9.11 U10.11 | length 375.1
  Top Layer w0.254: P8.3@14.224,13.081 P8.3 ; 77.851,32.639 77.978,32.512 ; U7.11@79.135,27.051 U7.11 ; U6.11@79.135,40.259 U6.11
  Top Layer w0.5: P8.3@14.224,13.081 16.129,11.176 19.939,11.176 ; U5.11 25.908,40.132 26.67,39.37 27.686,39.37 28.321,38.735 28.321,36.957 32.258,33.02 32.258,27.813 ; v1(33.655,27.813) 32.258,27.813 ; v1(60.579,68.707) U10.11 ; v1(61.875,10.795) 20.32,10.795 19.939,11.176 ; v1(76.581,8.763) 121.92,8.763 133.731,20.574 133.731,31.496 v1(132.207,33.02) 135.636,36.449 135.636,46.101 133.731,48.006 v1(133.731,57.912) ; 77.978,32.512 v1(80.645,32.512) ; U7.11@79.135,27.051 78.246,27.94 78,27.94 77.851,28.089 77.851,32.639 77.851,39.243 78.867,40.259 U6.11@79.135,40.259 ; U9.11 v1(108.204,69.596) ; v1(128.778,33.909) U8.4 ; 19.939,11.176 32.258,23.495 32.258,27.813
  Bottom Layer w0.254: v1(61.875,10.795) v1@62.129,11.049
  Bottom Layer w0.5: v1(33.655,27.813) 60.96,27.813 65.405,23.368 71.501,23.368 v1(80.645,32.512) ; v1(60.579,68.707) 65.151,73.279 104.521,73.279 v1(108.204,69.596) 111.379,72.771 123.952,72.771 133.731,62.992 v1(133.731,57.912) ; v1@62.129,11.049 65.786,11.049 68.072,8.763 v1(76.581,8.763) ; v1(128.778,33.909) 131.318,33.909 v1(132.207,33.02)
BAT: 
"Battery Charge": 
BZZ: 
CS: 
CS_LLS: 
CTW: R11.1 R12.2 R13.2 U7.10 | length 66.6
  Top Layer w0.254: R11.1 55.662,51.308 R12.2 56.222,51.308 59.944,51.308 ; R13.2 59.944,51.308 ; U7.10 81.407,25.781 84.074,28.448 84.074,42.672 79.375,47.371 70.612,47.371 68.834,49.149 68.834,52.197 67.437,53.594 59.966,53.594 59.817,53.445 59.817,51.435 59.944,51.308
CTW': MUX1.3 MUX2.3 U7.8 U7.9 | length 38.6
  Top Layer w0.254: U7.9 U7.8 84.328,23.241 88.011,19.558 90.043,19.558 90.827,20.342 90.827,20.552 90.816,20.563 MUX2.3 90.847,23.199 90.847,24.299 90.932,24.384 90.932,24.638 86.233,29.337 86.233,35.455 90.73,39.952 MUX1.3
D0_LLS: 
D+: 
D-: 
DI_LLS: 
GND: C16.1 C17.2 C18.2 C20.2 C21.2 C26.2 MUX1.2 MUX1.12 MUX1.13 MUX1.15 MUX1.16 MUX1.17 MUX1.18 MUX1.19 MUX1.20 MUX1.21 MUX1.22 MUX1.23 MUX2.2 MUX2.12 MUX2.13 MUX2.15 MUX2.16 MUX2.17 MUX2.18 MUX2.19 MUX2.20 MUX2.21 MUX2.22 MUX2.23 P8.2 POT3.1 POT3.2 POT6.1 POT8.3 POT9.3 U5.12 U8.5 U10.3 U10.10 | length 664.9
  Top Layer w0.254: v1(6.985,26.924) v1@7.179,27.118 ; C21.2@22.86,55.181 C21.2 ; C17.2 C17.2@24.511,28.835 ; U5.12@24.741,41.434 U5.12 ; POT9.3 POT9.3@45.461,64.643 ; v1(88.265,42.291) 89.931,42.291 90.08,42.142 MUX1.2 ; MUX2.2 MUX2.2@90.17,23.172 ; v1(93.091,45.339) 93.091,45.614 93.33,45.853 MUX1.18 ; MUX1.12 97.76,40.621 v1(98.668,41.529) ; 96.666,28.977 MUX2.13 ; U8.5 U8.5@128.875,40.767
  Top Layer w0.4: 87.376,65.681 87.376,78.994 ; MUX1.23 MUX1.22 ; MUX2.23 MUX2.22 ; MUX2.2@90.17,23.172 90.17,24.257 ; MUX1.16 MUX1.15 95.28,45.869 95.429,45.72 96.264,45.72 96.58,46.036 MUX1.13 ; MUX2.16 MUX2.15 95.366,28.724 95.515,28.575 96.264,28.575 96.666,28.977 ; MUX2.12 97.336,23.168
  Top Layer w0.5: v1@7.179,27.118 7.584,27.118 C16.1 ; P8.2 29.972,26.543 C18.2 ; C21.2@22.86,55.181 C20.2 22.86,42.291 23.717,41.434 U5.12@24.741,41.434 ; v1(24.511,25.781) C17.2@24.511,28.835 ; U5.12 26.162,41.402 27.051,40.513 v1(27.94,40.513) ; v1(37.973,60.198) 42.545,64.77 POT9.3 ; POT9.3@45.461,64.643 53.594,64.643 54.229,64.008 54.229,62.103 55.118,61.214 55.88,61.214 56.896,62.23 56.896,68.834 58.039,69.977 U10.10 ; U10.3 v1(70.739,67.437) ; v1(86.233,25.781) 88.646,25.781 90.17,24.257 ; 87.376,65.681 87.525,65.532 88.9,65.532 ; 87.376,78.994 POT3.1 POT3.2 90.932,83.058 109.223,83.058 POT6.1 ; v1(88.9,63.5) 88.9,65.532 ; MUX1.22 MUX1.21 MUX1.20 MUX1.19 MUX1.18 MUX1.17 MUX1.16 ; MUX2.22 MUX2.21 MUX2.20 MUX2.19 ; v1(92.766,27.559) MUX2.19 ; C26.2 91.313,67.564 89.281,65.532 88.9,65.532 ; MUX2.16 MUX2.17 MUX2.18 MUX2.19 ; 97.336,23.168 v1(98.806,24.638) ; U8.5@128.875,40.767 v1(130.683,40.767)
  Bottom Layer w0.254: 16.637,16.891 16.637,17.272 ; P8.2@16.764,12.954 P8.2 ; v1@37.846,60.325 v1(37.973,60.198) ; 57.912,60.198 58.039,60.325 ; 132.207,38.989 132.334,39.116
  Bottom Layer w0.5: v1(6.985,26.924) 16.637,17.272 ; P8.2@16.764,12.954 12.319,8.509 5.715,8.509 4.191,10.033 4.191,47.498 17.018,60.325 v1@37.846,60.325 ; v1(27.94,40.513) 27.94,29.21 v1(24.511,25.781) 24.511,24.765 16.637,16.891 16.764,16.764 P8.2 27.559,2.54 123.825,2.54 133.477,12.192 133.477,37.973 132.969,38.481 ; v1(37.973,60.198) 57.912,60.198 63.5,60.198 65.722,62.42 ; 58.039,60.325 POT8.3 ; v1(70.739,67.437) 65.722,62.42 ; v1(86.233,25.781) 87.249,26.797 87.249,27.178 87.63,27.559 v1(92.766,27.559) 95.885,27.559 ; v1(88.265,42.291) 90.043,42.291 v1(93.091,45.339) ; v1(88.9,63.5) 87.82,62.42 65.722,62.42 ; v1(98.668,41.529) 96.901,41.529 v1(93.091,45.339) ; v1(98.806,24.638) 95.885,27.559 ; v1(130.683,40.767) 132.334,39.116 132.969,38.481 ; 132.207,38.989 116.84,38.989 113.157,35.306 113.157,32.258 111.252,30.353 102.743,30.353 99.949,27.559 95.885,27.559 ; v1(93.091,45.339) 93.091,49.53 96.012,52.451 127.635,52.451 135.128,44.958 135.128,40.64 132.969,38.481
LA: J3.4 R7.1 | length 81.9
  Top Layer w0.254: R7.1 10.642,23.395 5.08,17.833 5.08,8.001 6.223,6.858 61.214,6.858 62.952,5.12 J3.4 66.604,5.12 67.577,4.147 J3.4@67.577,4.097
"LA\"": MUX1.8 MUX2.8 U6.6 U6.7 | length 81.7
  Top Layer w0.254: v1(72.263,35.052) 72.981,35.77 73.106,35.77 73.785,36.449 U6.7 U6.6 ; v1(85.852,51.054) 97.028,51.054 99.06,49.022 99.06,44.958 98.298,44.196 95.377,44.196 93.98,42.799 MUX1.8 93.98,39.37 100.33,33.02 100.33,28.956 96.412,25.038 94.256,25.038 94.066,24.849 MUX2.8
  Bottom Layer w0.254: v1(72.263,35.052) 80.264,35.052 81.026,35.814 81.026,36.322 82.169,37.465 84.582,37.465 85.852,38.735 v1(85.852,51.054)
LA': R12.1 R15.1 R16.2 U5.6 U5.7 U6.5 | length 99
  Top Layer w0.254: U5.7 19.423,37.211 19.931,37.719 v1(21.336,37.719) ; v1(27.305,47.371) 27.432,47.498 39.243,47.498 42.672,44.069 42.672,35.026 45.732,31.966 45.732,31.866 46.255,31.343 R15.1 48.615,31.343 ; R12.1 55.942,46.697 53.963,44.718 53.963,44.618 53.44,44.095 R16.2 53.24,44.095 52.717,43.572 52.717,43.472 49.911,40.666 49.911,32.639 48.615,31.343 ; U6.5 73.785,38.989 64.514,29.718 50.038,29.718 48.615,31.141 48.615,31.343
  Bottom Layer w0.254: v1(21.336,37.719) 21.336,38.1 21.971,38.735 21.971,40.259 27.305,45.593 v1(27.305,47.371)
LL: J3.3 R8.1 | length 82.5
  Top Layer w0.254: R8.1 18.77,23.242 17.823,22.295 17.823,21.887 17.399,21.463 11.557,21.463 6.858,16.764 6.858,10.414 8.255,9.017 63.119,9.017 63.119,8.255 63.373,8.001 66.435,8.001 J3.3
"LL\"": MUX1.7 MUX2.7 U6.8 U6.9 | length 54.2
  Top Layer w0.254: U6.8 U6.9 ; U6.8@79.637,36.322 v1(82.931,36.322) ; v1(87.122,48.006) 87.122,46.736 89.662,44.196 92.695,44.196 93.33,43.561 MUX1.7 93.33,39.004 99.314,33.02 99.314,29.337 95.504,25.527 93.565,25.527 93.416,25.378 MUX2.7
  Bottom Layer w0.254: v1(82.931,36.322) 84.582,36.322 87.122,38.862 v1(87.122,48.006)
LL': R13.1 R17.1 R19.1 U5.8 U5.9 U6.10 | length 108.2
  Top Layer w0.254: v1(22.098,34.163) 23.495,34.163 24.773,35.441 U5.8 U5.9 ; v1(29.083,45.847) 38.354,45.847 41.402,42.799 41.402,33.522 45.847,29.077 48.381,29.077 v1(48.387,29.083) ; v1(51.054,31.369) 53.568,31.369 R17.1 R19.1 62.076,31.343 62.599,31.866 62.599,31.966 66.066,35.433 66.066,37.084 ; R13.1 66.066,37.084 ; v1(67.945,37.084) 66.066,37.084 ; U6.10 79.574,38.925 82.486,38.925 v1(82.55,38.862)
  Bottom Layer w0.254: v1(22.098,34.163) 22.098,36.322 24.892,39.116 24.892,41.656 v1(29.083,45.847) ; v1(48.387,29.083) 50.445,31.141 50.826,31.141 v1(51.054,31.369) ; v1(67.945,37.084) 80.772,37.084 v1(82.55,38.862)
MISO: 
MOSI: 
MUX1: MUX1.1 R20.1 | length 30.6
  Top Layer w0.254: v1(88.265,39.116) 88.459,39.31 88.789,39.31 89.43,39.952 MUX1.1 ; v1(112.903,41.021) 115.544,41.021 R20.1
  Bottom Layer w0.254: v1(88.265,39.116) 110.998,39.116 v1(112.903,41.021)
MUX2: MUX2.1 R21.1 | length 37.2
  Top Layer w0.254: v1(88.459,21.082) 89.178,21.8 89.178,22.161 89.516,22.499 MUX2.1 ; v1(93.091,17.907) 101.447,17.907 115.175,31.635 115.275,31.635 115.798,32.158 R21.1
  Bottom Layer w0.254: v1(88.459,21.082) 89.916,21.082 v1(93.091,17.907)
NetA_G_9: 
NetA_G_10: 
NetA_G_20: 
NetC1_2: 
NetC3_1: 
NetC5_1: 
NetC9_1: 
NetC9_2: 
NetC16_2: C16.2 R6.2 U5.3 | length 20.6
  Top Layer w0.254: C16.2 13.438,41.352 12.345,42.445 R6.2 17.905,42.545 19.048,41.402 U5.3
NetC17_1: C17.1 R7.2 U5.5 | length 28.7
  Top Layer w0.254: R7.2 15.599,23.495 15.748,23.644 15.748,35.306 ; U5.5 17.78,38.862 15.748,36.83 15.748,35.306 ; C17.1 21.838,29.232 15.764,35.306 15.748,35.306
NetC18_1: C18.1 R8.2 U5.10 | length 24
  Top Layer w0.254: R8.2 24.739,23.342 27.305,25.908 27.305,31.496 ; U5.10 26.162,38.862 27.305,37.719 27.305,31.496 ; C18.1 27.438,31.629 27.305,31.496
NetC19_2: C19.2 R9.1 | length 6
  Top Layer w0.254: R9.1 37.699,38.709 C19.2
NetC22_2: C22.2 C23.2 C24.1 R24.1 | length 14.8
  Top Layer w0.254: C22.2 C22.2@88.787,72.517 ; C23.2 C22.2@88.787,72.517 ; R24.1 95.916,76.555 93.137,73.776 93.137,72.562 C24.1 92.629,72.218 89.086,72.218 C22.2@88.787,72.517
NetC24_2: C24.2 POT3.3 U9.3 | length 22.9
  Top Layer w0.254: POT3.3@91.113,80.699 POT3.3 91.921,80.518 94.488,77.951 98.198,77.951 98.679,77.47 98.679,70.739 ; C24.2@95.639,72.511 C24.2 95.264,71.86 96.385,70.739 98.679,70.739 ; U9.3 100.711,70.739 98.679,70.739
NetC25_1: C25.1 POT4.1 R25.2 | length 35.6
  Top Layer w0.254: C25.1 95.264,60.065 97.947,57.382 98.157,57.382 98.179,57.404 104.656,57.404 105.918,58.666 POT4.1 104.275,61.46 104.275,75.311 105.571,76.607 R25.2
NetC26_1: C26.1 POT4.2 POT4.3 U9.5 | length 19.2
  Top Layer w0.254: C26.1 98.052,67.564 98.814,68.326 U9.5 101.862,68.326 103.005,67.183 103.005,63.627 100.838,61.46 POT4.3 POT4.2
NetC27_1: C27.1 C28.1 R26.2 R27.1 | length 13.4
  Top Layer w0.254: R27.1 R26.2@118.727,66.167 ; R26.2 R26.2@118.727,66.167 ; C28.1 118.955,71.241 C27.1 R26.2@118.727,66.167
NetC27_2: C27.2 C28.2 R28.2 U9.13 U9.14 | length 26
  Top Layer w0.254: U9.13 U9.14 106.563,73.406 106.736,73.579 106.736,74.089 109.99,77.343 115.044,77.343 116.695,78.994 R28.2 118.727,78.861 C27.2 118.955,73.793 C28.2
NetC29_2: C29.2 C30.1 POT5.1 POT5.2 | length 19.7
  Top Layer w0.254: C30.1@114.568,59.182 117.858,59.182 117.858,61.087 v1(120.15,63.379) ; v1(124.087,63.379) 124.362,63.379 124.61,63.627 POT5.2 POT5.1
  Bottom Layer w0.254: v1(120.15,63.379) v1(124.087,63.379)
NetC30_2: C30.2 R27.2 U9.10 | length 13.7
  Top Layer w0.254: U9.10 108.847,68.326 111.006,66.167 R27.2 112.016,66.06 C30.2
NetC33_2: 
NetD1_1: 
NetD2_1: 
NetD3_2: 
NetD10_2: 
NetPOT1_1: 
NetPOT2_1: POT2.1 POT2.2 R23.1 U8.8 | length 41.3
  Top Layer w0.254: U8.8 124.968,44.704 126.238,45.974 130.048,45.974 132.28,43.742 132.28,35.633 126.873,30.226 POT2.2 ; POT2.1 POT2.2 ; R23.1 131.344,24.49 POT2.2
NetPOT2_3: POT2.3 R22.2 U8.1 | length 16.3
  Top Layer w0.254: R22.2 119.608,24.236 POT2.3 124.333,34.737 124.968,35.372 U8.1
NetPOT5_3: POT5.3 R28.1 | length 15.7
  Top Layer w0.254: R28.1 121.96,78.894 128.786,72.068 POT5.3
NetPOT6_2: POT6.2 U9.12 | length 9.5
  Top Layer w0.254: U9.12 107.953,70.866 POT6.2
NetPOT7_3: POT7.3 R29.1 U10.2 | length 19.2
  Top Layer w0.254: U10.2 74.808,66.167 POT7.3 75.591,71.628 R29.1
NetPOT8_2: POT8.2 R30.2 R31.1 U10.9 | length 19.6
  Top Layer w0.254: R31.1 R30.2 ; POT8.2 55.499,68.681 57.67,70.852 57.67,70.952 58.193,71.475 R30.2 ; U10.9 58.521,71.247 R30.2
NetPOT9_2: POT9.2 U10.12 | length 18.5
  Top Layer w0.254: POT9.2 52.678,67.31 v1(53.44,68.072) ; v1(58.166,67.945) 58.441,67.945 58.949,67.437 U10.12
  Bottom Layer w0.254: v1(53.44,68.072) 53.503,68.008 58.102,68.008 v1(58.166,67.945)
NetQ1_1: 
NetQ1_2: 
NetQ2_1: 
NetQ2_2: 
NetR2_1: 
NetR3_1: 
NetR20_2: R20.2 U8.3 | length 11.8
  Top Layer w0.254: R20.2 122.174,41.275 124.74,38.709 126.518,38.709 127.508,37.719 U8.3
NetR21_2: R21.2 U8.2 | length 12.6
  Top Layer w0.254: R21.2 118.898,34.062 122.936,38.1 125.73,38.1 126.238,37.592 U8.2
NetR32_2: 
NetR37_2: 
NetR38_2: 
NetR39_2: 
NetR40_2: 
NetRPROG_2: 
OUT1: C22.1 C23.1 U8.6 | length 75.2
  Top Layer w0.254: C22.1@86.108,72.92 C22.1 86.235,72.517 C23.1 86.235,62.99 93.98,55.245 123.317,55.245 133.731,44.831 v1(133.731,42.799) 133.925,42.605 v1@134.322,42.605 ; U8.6 127.508,41.402 128.905,42.799 v1(130.683,42.799)
  Bottom Layer w0.5: v1(130.683,42.799) v1(133.731,42.799)
OUT2: R24.2 R25.1 U9.1 U9.2 | length 13.9
  Top Layer w0.254: R24.2 100.667,79.655 101.848,78.474 101.948,78.474 102.471,77.951 R25.1 102.471,76.72 101.386,75.635 101.386,73.579 101.213,73.406 U9.1 U9.2
OUT3: C25.2 C29.1 R26.1 U9.6 U9.7 | length 55
  Top Layer w0.254: C25.2 92.712,63.268 94.467,65.024 97.544,65.024 99.576,67.056 U9.6 U9.7 100.463,65.786 99.659,64.982 99.659,64.726 v1(98.941,64.008) ; v1(106.688,63.881) 108.085,63.881 109.99,61.976 109.99,56.791 110.139,56.642 120.785,56.642 122.477,58.334 122.477,59.309 ; C29.1 122.477,59.309 ; R26.1@121.431,65.417 121.954,65.94 122.477,65.417 122.477,59.309
  Bottom Layer w0.254: v1(98.941,64.008) 99.004,63.944 106.624,63.944 v1(106.688,63.881)
OUT4: POT6.3 POT7.1 POT7.2 U9.8 U9.9 | length 44
  Top Layer w0.254: POT7.2 POT7.1 80.65,66.167 v1(84.201,66.167) ; U9.9 U9.8 107.556,65.786 108.064,66.294 v1(108.339,66.294) ; v1(110.244,69.596) 110.244,70.617 POT6.3
  Bottom Layer w0.254: v1(84.201,66.167) 84.264,66.23 108.275,66.23 v1(108.339,66.294) 108.339,67.691 v1(110.244,69.596)
OUT5: R29.2 U10.1 U10.5 | length 12.5
  Top Layer w0.254: U10.1 67.31,64.897 66.675,65.532 66.675,69.215 67.437,69.977 U10.5 70.178,69.977 72.11,71.909 R29.2
OUT6: R30.1 U10.6 U10.7 | length 12.4
  Top Layer w0.254: R30.1 66.155,74.575 68.213,72.517 U10.7 U10.6
OUT7: POT9.1 R31.2 U10.8 | length 20.7
  Top Layer w0.254: POT9.1 48.515,69.85 53.24,74.575 R31.2 53.44,74.575 54.99,73.025 59.817,73.025 60.325,72.517 U10.8
OUT8: J6.1 U10.13 U10.14 | length 7.7
  Top Layer w0.254: U10.13 U10.14 63.613,64.897 63.786,64.724 63.786,62.766 J6.1@66.517,60.035
RA: J3.1 R6.1 | length 122.5
  Top Layer w0.254: R6.1 9.245,42.445 3.683,36.883 3.683,5.991 7.642,2.032 71.545,2.032 73.554,4.041 J3.1 73.704,13.62 74.677,12.647 74.677,12.497
"RA\"": MUX1.9 MUX2.9 U6.1 U6.2 | length 76
  Top Layer w0.254: v1(70.993,43.942) 71.056,44.005 74.097,44.005 U6.1 U6.2 ; v1(84.328,52.451) 97.028,52.451 99.949,49.53 99.949,44.45 98.806,43.307 95.631,43.307 94.615,42.291 94.615,40.636 MUX1.9 94.661,40.59 94.661,39.519 94.81,39.37 94.996,39.37 101.092,33.274 101.092,28.575 97.028,24.511 94.891,24.511 94.747,24.367 94.747,23.199 MUX2.9 MUX2.9@94.716,23.837
  Bottom Layer w0.254: v1(70.993,43.942) 79.502,52.451 v1(84.328,52.451)
RA': R11.2 R14.1 R18.2 U5.1 U5.2 U6.3 | length 80.7
  Top Layer w0.254: v1(16.51,46.863) 16.704,46.669 16.704,46.286 19.048,43.942 U5.1 U5.2 ; v1(25.908,48.641) 43.635,48.641 R11.2@46.202,51.208 ; R14.1 46.202,43.867 R11.2@46.202,51.208 ; v1(50.546,46.482) 50.352,46.676 50.352,47.058 R11.2@46.202,51.208 ; v1(58.928,46.355) 59.997,46.355 61.876,44.476 R18.2 ; v1(70.993,41.783) 71.12,41.656 74.033,41.656 U6.3
  Bottom Layer w0.254: v1(16.51,46.863) 18.288,48.641 v1(25.908,48.641) ; v1(50.546,46.482) 50.609,46.419 58.864,46.419 v1(58.928,46.355) 63.5,41.783 v1(70.993,41.783)
RL: C19.1 J3.2 R10.1 U5.14 | length 66.9
  Top Layer w0.254: U5.14 34.782,43.942 37.443,41.281 C19.1 39.983,41.281 40.132,41.133 40.132,32.385 39.624,31.877 ; R10.1 39.624,31.877 ; J3.2 66.754,19.479 59.182,27.051 44.45,27.051 39.624,31.877
RL': R9.2 R10.2 R22.1 R23.2 U5.13 | length 127.8
  Top Layer w0.254: U5.13 24.9,42.545 26.416,42.545 27.152,41.809 29.591,41.809 ; R9.2 29.591,41.809 ; v1(35.179,23.749) 35.179,31.724 35.306,31.851 R10.2 35.28,31.977 29.718,37.539 29.718,41.682 29.591,41.809 ; v1(96.901,14.605) 115.342,14.605 122.085,21.348 122.185,21.348 122.708,21.871 R22.1 122.835,21.844 R23.2
  Bottom Layer w0.254: v1(35.179,23.749) 40.132,23.749 49.276,14.605 v1(96.901,14.605)
RX: 
S0_1: MUX1.10 P6.1 | length 10.8
  Top Layer w0.254: MUX1.10 95.28,39.952 96.503,38.729 100.451,38.729 102.478,40.756 102.986,40.756 P6.1
S0_2: MUX2.10 P7.1 | length 19.6
  Top Layer w0.254: MUX2.10 95.366,20.839 96.139,20.066 v1(97.409,20.066) ; v1(103.886,28.067) P7.1
  Bottom Layer w0.254: v1(97.409,20.066) 97.409,21.59 v1(103.886,28.067)
S1_1: MUX1.11 P6.2 | length 13.5
  Top Layer w0.254: MUX1.11 95.93,39.952 96.639,39.243 98.668,39.243 102.478,43.053 104.775,43.053 P6.2
S1_2: MUX2.11 P7.2 | length 19.6
  Top Layer w0.254: MUX2.11 96.016,21.713 96.266,21.463 101.092,21.463 106.426,26.797 P7.2
S2_1: MUX1.14 P6.3 | length 20.7
  Top Layer w0.254: MUX1.14 95.961,47.402 95.961,49.606 v1(96.139,49.784) ; v1(108.712,45.212) 108.775,45.148 108.775,41.593 P6.3
  Bottom Layer w0.254: v1(96.139,49.784) 104.14,49.784 v1(108.712,45.212)
S2_2: MUX2.14 P7.3 | length 19.9
  Top Layer w0.254: MUX2.14 96.047,29.949 96.047,32.547 v1(96.139,32.639) ; v1(108.585,35.56) 108.775,35.369 108.775,32.448 P7.3
  Bottom Layer w0.254: v1(96.139,32.639) 101.346,32.639 104.267,35.56 v1(108.585,35.56)
SCK: 
SCK_LLS: 
SCL: 
SDA: 
SW1: 
SW2: 
TX: 
VBUS: 
pads on no net: J3. U7.12 U7.13 U7.14

## Polygon pours and split planes (outlines as drawn)
GND on Top Layer "POWER-GND" (solid, remove dead copper, pour order 13): 0,0 137.922,0 137.922,86.741 0,86.741
GND on Bottom Layer "POWER-GND" (solid, remove dead copper, pour order 14): 0,0 137.922,0 137.922,86.741 0,86.741

## Silkscreen, mask and mechanical layers (free items; w line width, h text height)
Top Overlay:
  region: 2425 vertices and 0 holes, not listed, extent 2.013,76.108 7.288,82.305
  text "IOT HOLTER MONITOR" at 9.525,77.978 h3
  text "DESIGNED BY DAMIAN GOMEZ" at 3.556,72.009 h2.5
  text "11/2022" at 15.876,66.929 h3